# EAGLE board RFM69_RPI_adapter (EAGLE 8.5.1)
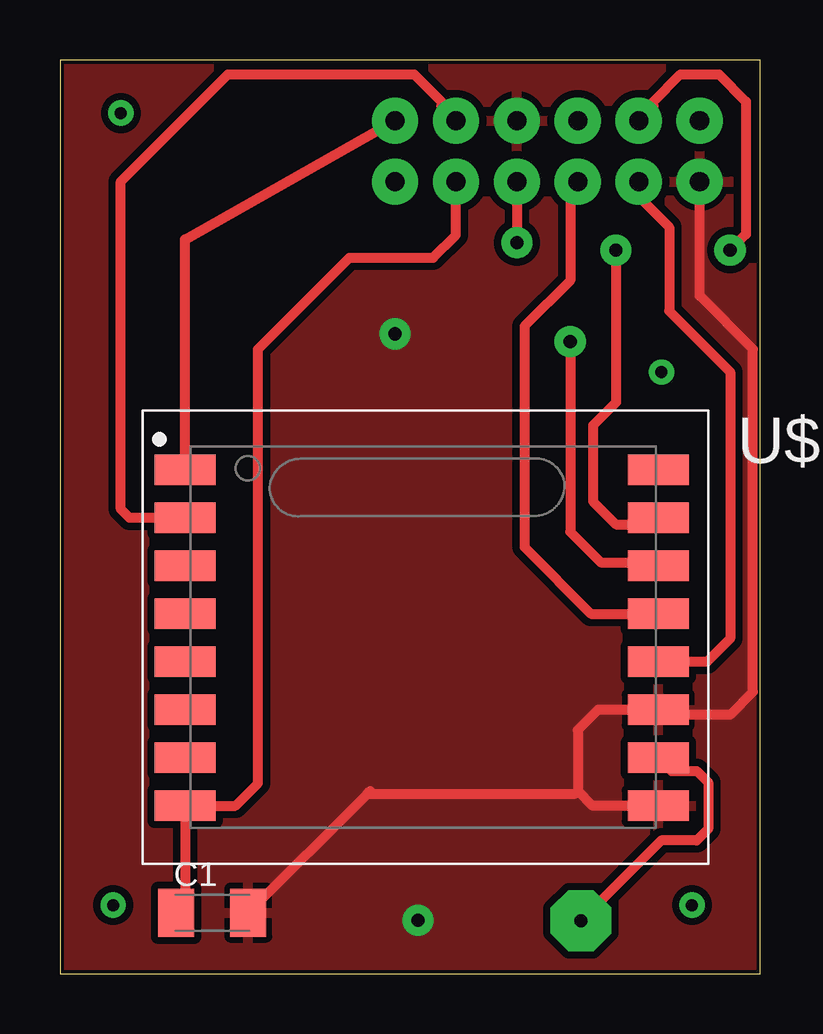
[diagram p0: board, top side]
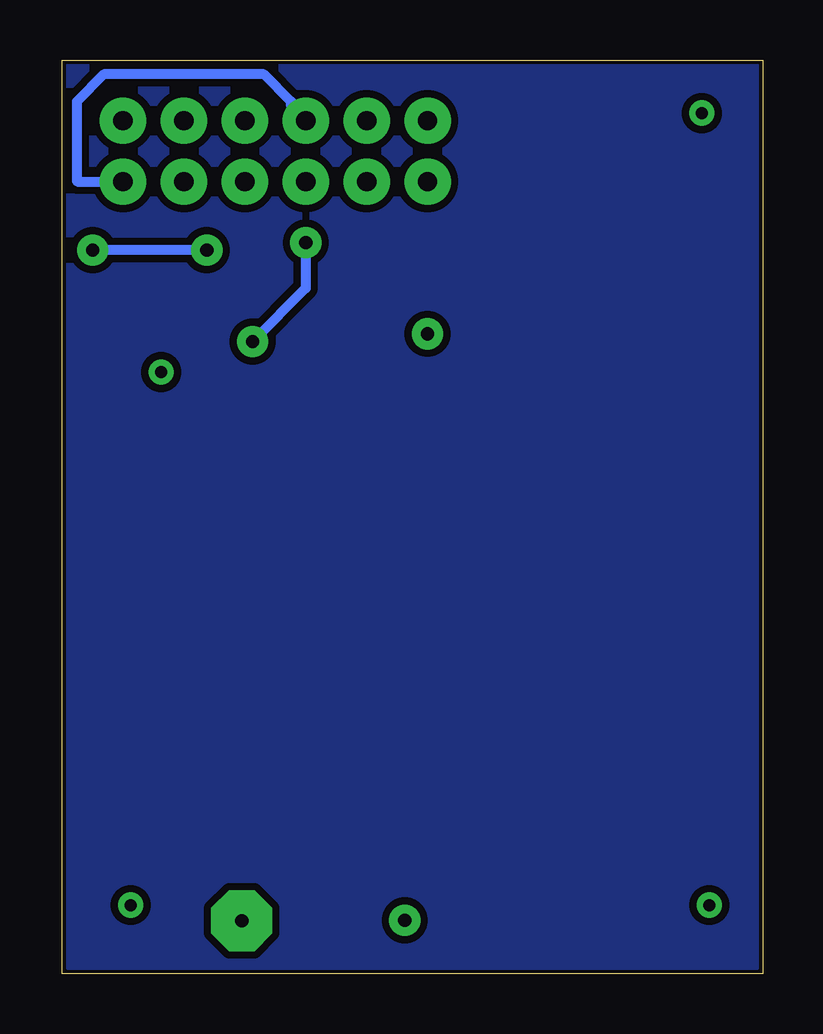
[diagram p1: board, bottom side, seen from below]

Size 29.2 x 38.09 mm. Coordinates in mm from the lower left corner, seen from the top.
Outline: 0,0 29.2,0 29.2,38.09 0,38.09 0,0
Copper layers (1*16): Top 0.035mm / dielectric 1.5mm / Bottom 0.035mm
Design rules "default *": minimum track width 6mil, minimum drill 0.35mm, track to track 12mil, track to pad 30mil, pad to pad 12mil, via to via 12mil, smd to smd 6mil, copper to edge 6mil, drill to drill 6mil, minimum pad ring 10mil, minimum via ring 8mil, stop-mask expansion 4mil, vias tented up to drill 0mil, thermal gap 10mil
Net classes: 1 power: width 0.203 mm, drill 0.305 mm, clearance 0.152 mm

## Footprints (pad centres in the part's own frame; a part is rotated, then mirrored left to right if it is on the bottom)
C1206K = smd 1.5 x 2: 1 -1.5,0; 2 1.5,0
RFM69W/HW = smd 2.54 x 1.27: P$1 -10.03,7.035; P$2 -10.03,5.035; P$3 -10.03,3.035; P$4 -10.03,1.035; P$5 -10.03,-0.965; P$6 -10.03,-2.965; P$7 -10.03,-4.965; P$8 -10.03,-6.965; P$9 9.7,-6.965; P$10 9.7,-4.965; P$11 9.7,-2.965; P$12 9.7,-0.965; P$13 9.7,1.035; P$14 9.7,3.035; P$15 9.7,5.035; P$16 9.7,7.035
RASPBP1_16-26 = drill 0.8 pad 1.93: 15-GPIO22 0,8.89; 16-GPIO23 2.54,8.89; 17-3V3POWER 0,6.35; 18-GPIO24 2.54,6.35; 19-GPIO10-MOSI 0,3.81; 20-GND 2.54,3.81; 21-GPIO9-MISO 0,1.27; 22-GPIO25 2.54,1.27; 23-GPIO11-SCKL 0,-1.27; 24-GPIO8-CE0 2.54,-1.27; 25-GND 0,-3.81; 26.GPIO6-CE1 2.54,-3.81

## Placement (x,y rotation side)
C1  [C1206K]  6.35,2.54 0 top
U$1  [RFM69W/HW]  15.24,13.97 0 top
U$2  RASPBPI_16-26  [RASPBP1_16-26]  22.86,33.02 90 top

## Library data of the parts
C1 = rcl; SPICEPREFIX: C
U$1 = HopeRF
U$2 = My_library

## Nets
ANT: U$1.P$10
CS: U$1.P$15 U$2.24-GPIO8-CE0
DIO0: U$1.P$2 U$2.18-GPIO24
GND: C1.2 U$1.P$9 U$1.P$11 U$2.20-GND U$2.25-GND
MISO: U$1.P$13 U$2.21-GPIO9-MISO
MOSI: U$1.P$14 U$2.19-GPIO10-MOSI
N$1: U$2.26.GPIO6-CE1
N$5: U$2.22-GPIO25
N$12: U$2.15-GPIO22
RESET: U$1.P$1 U$2.16-GPIO23
SCK: U$1.P$12 U$2.23-GPIO11-SCKL
VCC: C1.1 U$1.P$8 U$2.17-3V3POWER

## Tracks (layer width: path | path; a pad name or v marks a point on that pad's centre or on a via)
ANT  (via drill 0.55 pad 2.54)
  Top 0.406: U$1.P$10 25.49,8.45 26.55,8.45 27.02,7.98 27.02,6.03 26.55,5.56 25.06,5.56 v21.72,2.21
CS  (via drill 0.55 pad 1.3)
  Top 0.406: U$2.24-GPIO8-CE0 24.74,36.17 24.74,36.36 25.87,37.49 27.47,37.49 28.6,36.36 28.6,30.82 v27.94,30.16 | v23.18,30.16 23.18,23.81 22.22,22.86 22.22,19.68 23.18,18.73 24.67,18.73 U$1.P$15
  Bottom 0.406: v23.18,30.16 v27.94,30.16
DIO0
  Top 0.406: U$1.P$2 2.9,19 2.54,19.37 2.54,33.02 7.01,37.49 14.77,37.49 15.9,36.36 15.9,36.17 U$2.18-GPIO24
GND  (via drill 0.55 pad 1.3)
  Top 0.406: U$1.P$11 23.71,11 | C1.2 12.82,7.51 | 12.82,7.51 12.93,7.62 | U$1.P$9 22.21,7.01 21.59,7.62 | U$1.P$11 22.43,11 21.59,10.16 21.59,7.62 | 12.82,7.51 21.48,7.51 21.59,7.62 | U$1.P$11 25.15,10.79 27.94,10.79 28.89,11.75 28.89,26.04 26.67,28.26 U$2.25-GND
  Bottom 0.406: U$2.20-GND 19.66,36.17 19.66,36.36 20.79,37.49 27.47,37.49 28.6,36.36 28.6,33.05 28.57,33.02 U$2.25-GND
  other vias: 13.97,26.67 14.92,2.22
  pour Top: 0,38.1 0,0 29.21,0 29.21,38.1
MISO
  Top 0.406: U$2.21-GPIO9-MISO 21.27,32.7 21.27,28.89 19.37,26.99 19.37,17.78 22.14,15 U$1.P$13
MOSI  (via drill 0.55 pad 1.3)
  Top 0.152: 23.9,17.02 24.45,17.02 24.82,17.02 U$1.P$14
  Top 0.406: U$2.19-GPIO10-MOSI v19.05,30.48 | v21.27,26.35 21.27,18.42 22.54,17.14 24.32,17.14 24.45,17.02
  Bottom 0.406: v19.05,30.48 19.05,28.57 v21.27,26.35
N$2  (via drill 0.5 pad 1.05)
  other vias: 2.54,35.88
N$3  (via drill 0.5 pad 1.05)
  other vias: 2.22,2.86
N$4  (via drill 0.5 pad 1.05)
  other vias: 26.35,2.86
N$6  (via drill 0.5 pad 1.05)
  other vias: 25.08,25.08
N$7
  pour Bottom: 0.32,37.78 28.89,37.78 28.89,0.32 0.32,0.32
RESET
  Top 0.406: U$1.P$1 5.21,30.61 U$2.16-GPIO23
SCK
  Top 0.406: U$2.23-GPIO11-SCKL 24.13,32.39 25.4,31.11 25.4,27.62 27.94,25.08 27.94,13.97 26.97,13 U$1.P$12
VCC
  Top 0.406: C1.1 5.21,2.9 U$1.P$8 7.32,7.01 8.25,7.94 8.25,26.04 12.07,29.85 15.56,29.85 16.51,30.8 U$2.17-3V3POWER